# Allegro board pcb_final.brd
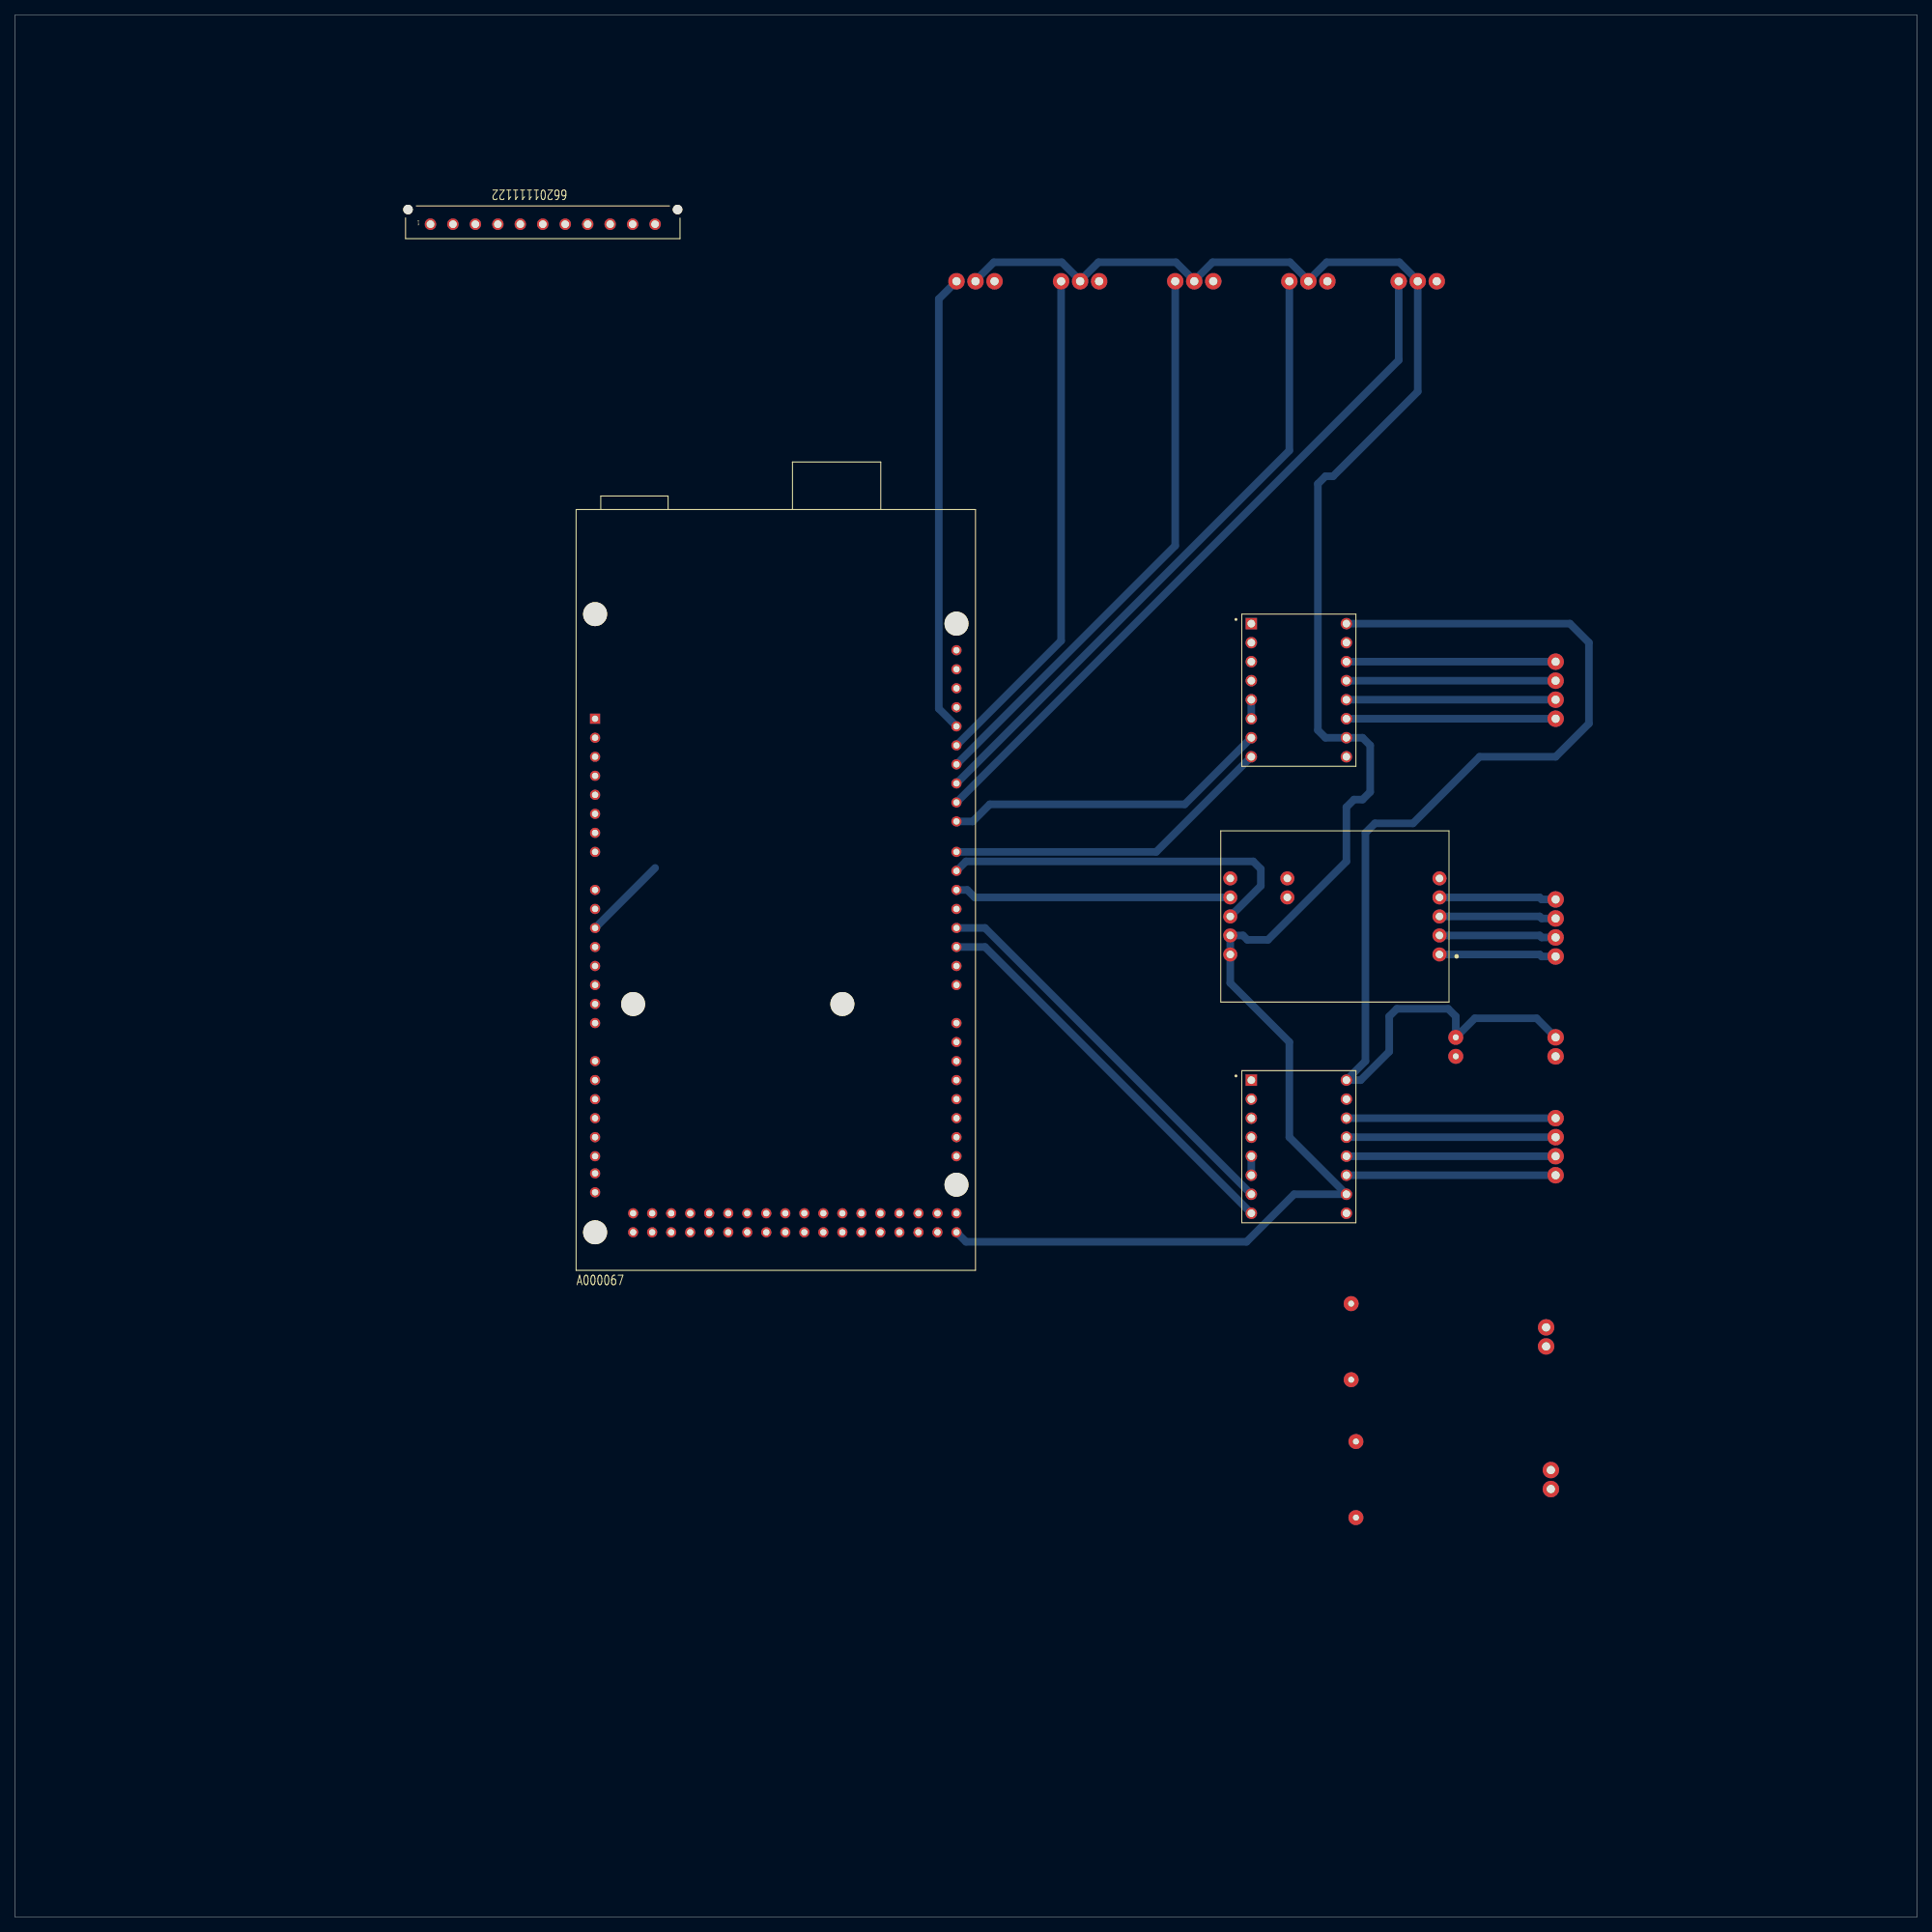
[diagram p0: board, top side]
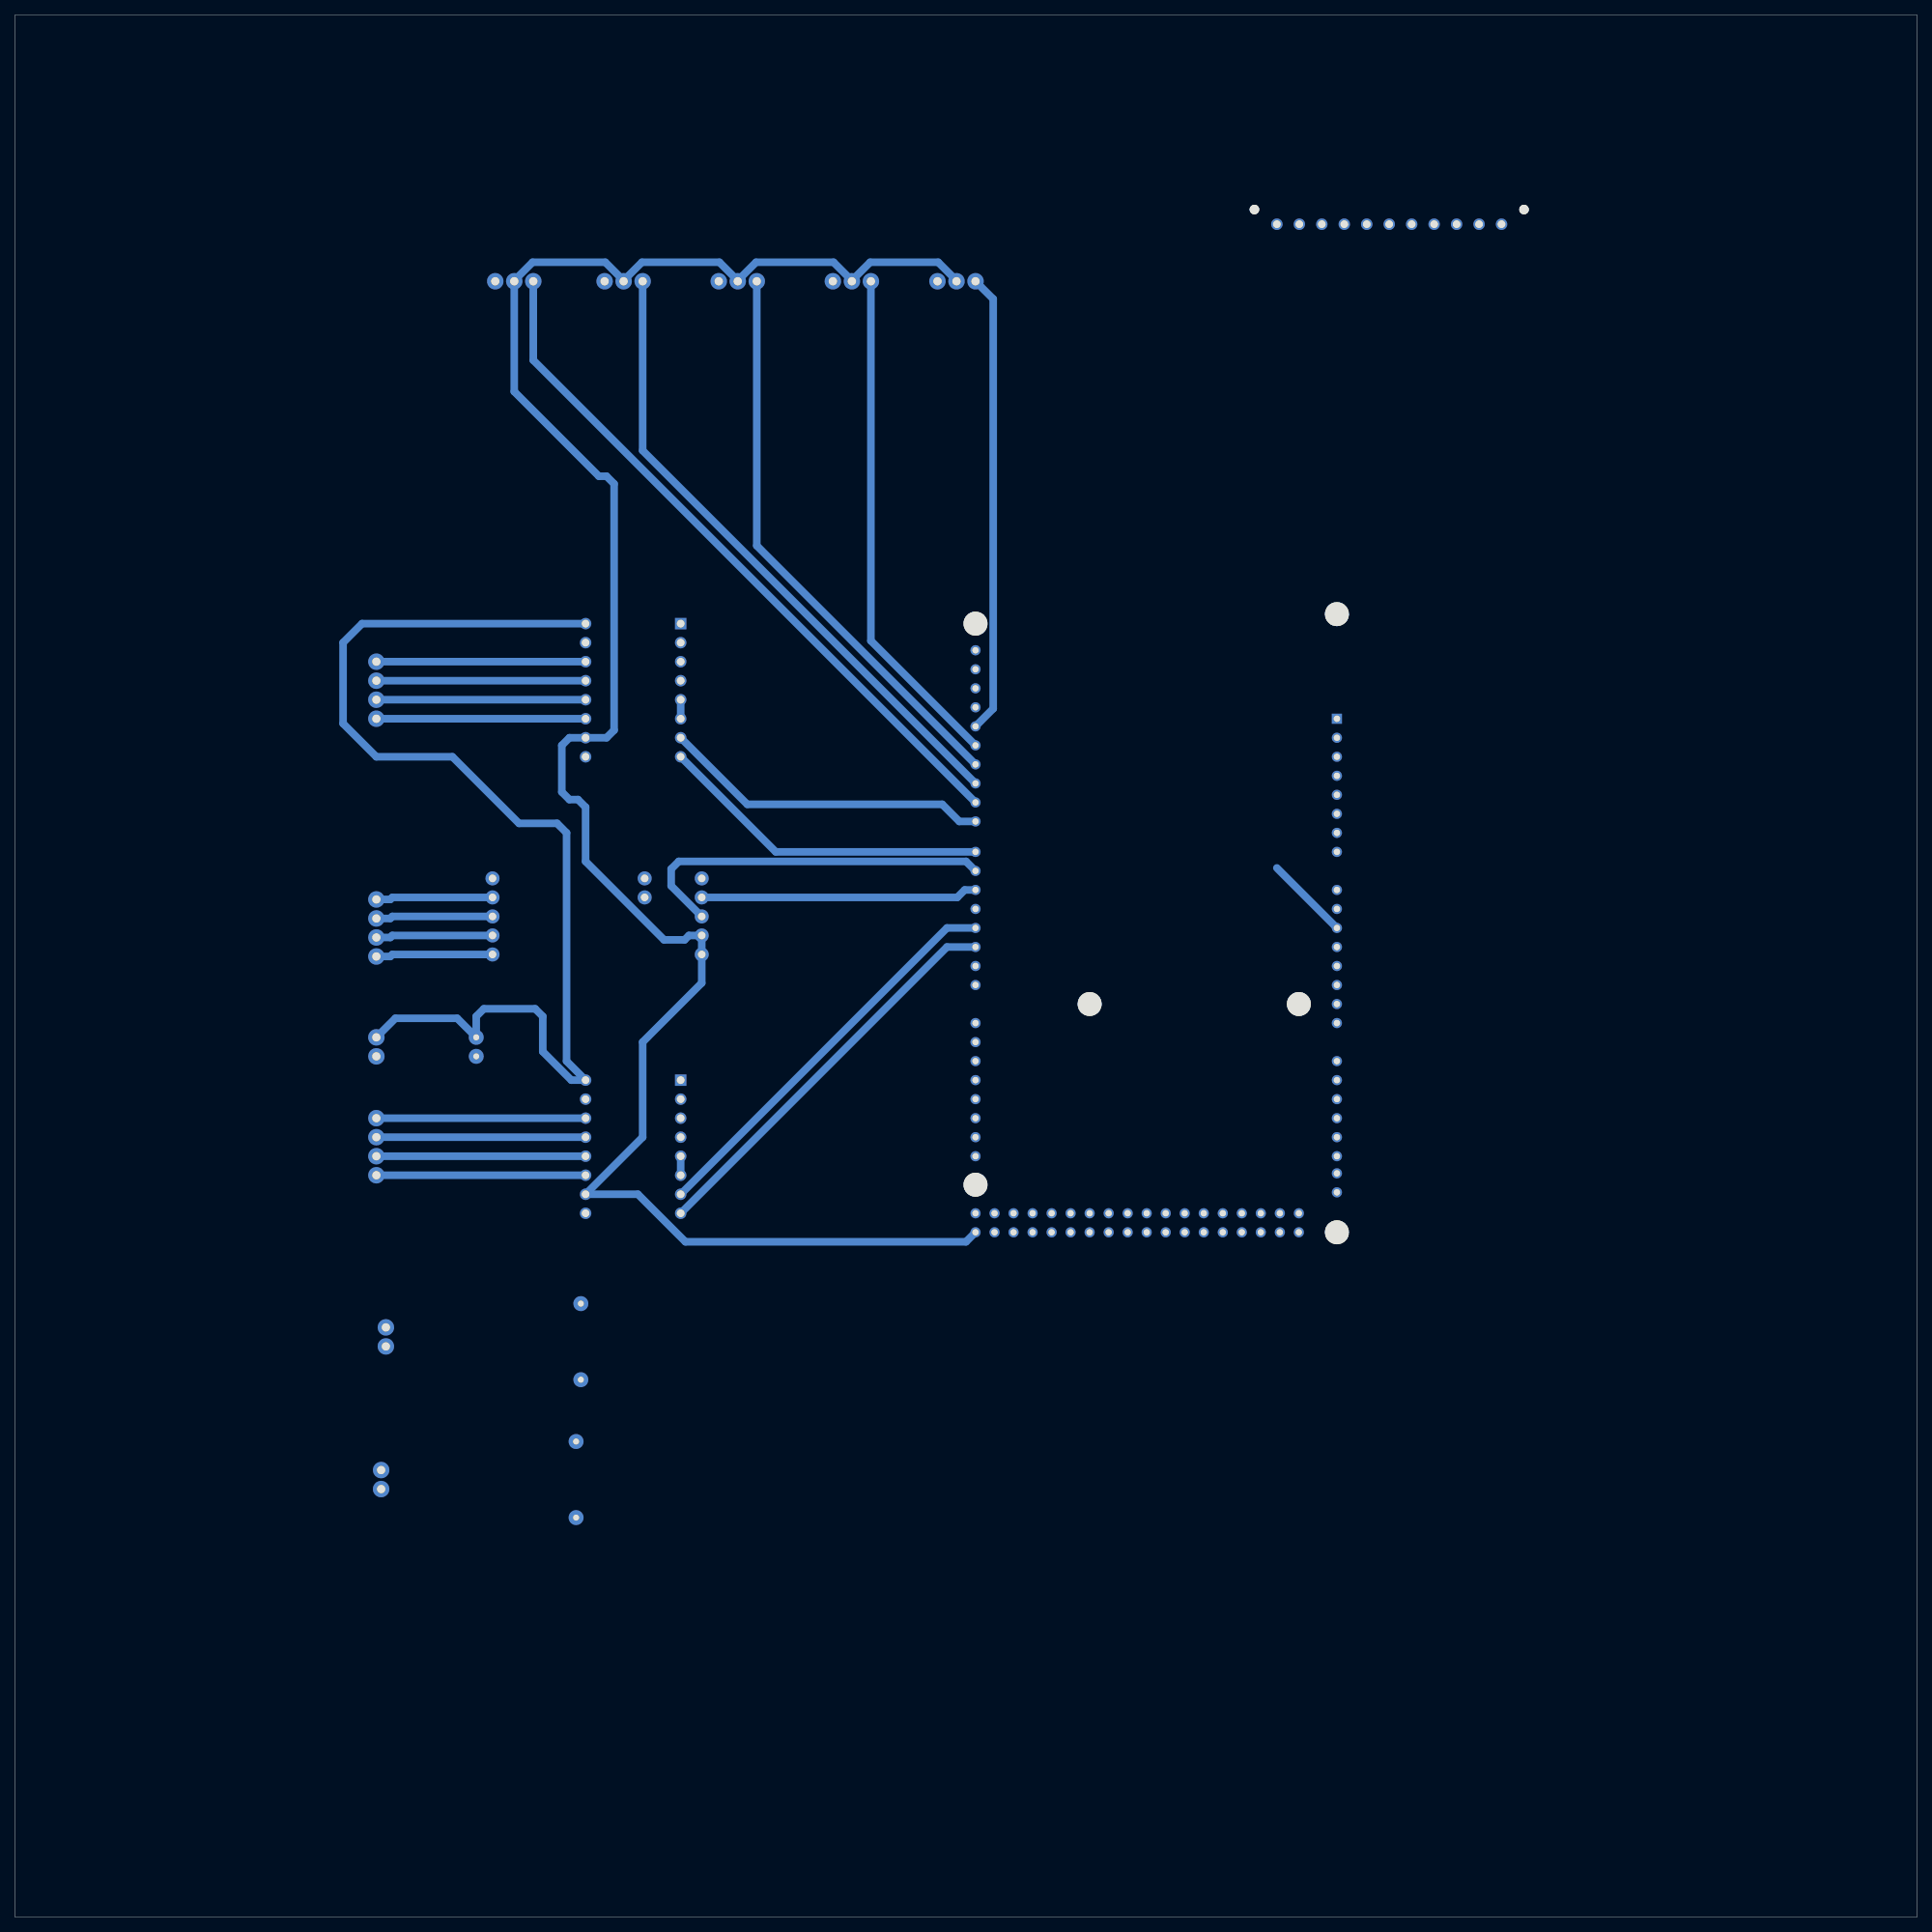
[diagram p1: board, bottom side, seen from below]

Outline 254 x 254 mm; copper layers: TOP, BOTTOM. Coordinates in mm from the lower left corner of the outline.
Outline path: 0,254 254,254 254,0 0,0 0,254

## Design rules (mm)
constraint set DEFAULT: min track width 1.016

## Placement (name value [footprint] x y rotation side)
ARDUINO_MEGA2560  A000067  [ARDUINO_A000067]  101.6 137.16 0 top
BALANCE  HEADER 4  [CON_04]  205.74 135.89 270 top
BOUTON_BLEU  HEADER 2  [CON_02]  205.1 59.69 270 top
BOUTON_ROUGE  HEADER 2  [CON_02]  204.47 78.74 270 top
C1  100u  [CAP_03]  192.41 114.94 90 top
DRIVER_BALANCE  SEN-13879  [SPARKFUN_SEN-13879]  175.26 134.62 180 top
DRIVER_MOTEUR1  A4988_STEPPER_MOTOR_DRIVER_CARRIER  [MODULE_A4988_STEPPER_MOTOR_]  171.45 163.83 0 top
DRIVER_MOTEUR2  A4988_STEPPER_MOTOR_DRIVER_CARRIER  [MODULE_A4988_STEPPER_MOTOR_]  171.45 102.87 0 top
ECRAN  1-11  [66201111122]  70.48 226.06 180 top
MOTEUR_PAP1  HEADER 4  [CON_04]  205.74 160.02 90 top
MOTEUR_PAP2  HEADER 4  [CON_04]  205.74 99.06 90 top
R1  10k  [RES_01]  178.44 71.75 90 top
R2  10k  [RES_01]  179.07 63.5 270 top
SERVO1  HEADER 3  [CON_03]  184.78 218.44 0 top
SERVO2  HEADER 3  [CON_03]  170.18 218.44 0 top
SERVO3  HEADER 3  [CON_03]  154.94 218.44 0 top
SERVO4  HEADER 3  [CON_03]  139.7 218.44 0 top
SERVO5  HEADER 3  [CON_03]  125.73 218.44 0 top
V_MOTEUR  HEADER 2  [CON_02]  205.74 117.47 270 top

## Library data of the parts
ARDUINO_MEGA2560 = A000067
BALANCE MOTEUR_PAP1 MOTEUR_PAP2 = HEADER 4
BOUTON_BLEU BOUTON_ROUGE V_MOTEUR = HEADER 2
C1 = C
DRIVER_BALANCE = SEN-13879
DRIVER_MOTEUR1 DRIVER_MOTEUR2 = A4988_STEPPER_MOTOR_DRIVER_CA
ECRAN = 1-11
R1 R2 = R
SERVO1-SERVO5 = HEADER 3

## Footprints (pads in the part's own frame, mm; a bottom-side part is the same pattern mirrored in y, then rotated)
66201111122
  round 1.27 hole 1.27 unplated: (-18,-1.96) (18,-1.96)
  round 1.53 hole 1.02: 1(15,0) 2(12,0) 3(9,0) 4(6,0) 5(3,0) 6(0,0) 7(-3,0) 8(-6,0) 9(-9,0) 10(-12,0) 11(-15,0)
ARDUINO_A000067
  round 3.2 hole 3.2 unplated: (-24.13,36.83) (-24.13,-45.72) (-19.05,-15.24) (8.89,-15.24) (24.13,35.56) (24.13,-39.37)
  round 1.358 hole 0.85: 1(24.13,-10.16) 2(24.13,-7.62) 3(24.13,-5.08) 3V3(-24.13,15.24) 4(24.13,-2.54) 5(24.13,0) 5V_1(-24.13,12.7) 5V_2(24.13,-43.18) 5V_3(24.13,-45.72) 6(24.13,2.54) 7(24.13,5.08) 8(24.13,9.144) 9(24.13,11.684) 10(24.13,14.224) 11(24.13,16.764) 12(24.13,19.304) 13(24.13,21.844) 14(24.13,-17.78) 15(24.13,-20.32) 16(24.13,-22.86) 17(24.13,-25.4) 18(24.13,-27.94) 19(24.13,-30.48) 20(24.13,-33.02) 21(24.13,-35.56) 22(21.59,-43.18) 23(21.59,-45.72) 24(19.05,-43.18) 25(19.05,-45.72) 26(16.51,-43.18) 27(16.51,-45.72) 28(13.97,-43.18) 29(13.97,-45.72) 30(11.43,-43.18) 31(11.43,-45.72) 32(8.89,-43.18) 33(8.89,-45.72) 34(6.35,-43.18) 35(6.35,-45.72) 36(3.81,-43.18) 37(3.81,-45.72) 38(1.27,-43.18) 39(1.27,-45.72) 40(-1.27,-43.18) 41(-1.27,-45.72) 42(-3.81,-43.18) 43(-3.81,-45.72) 44(-6.35,-43.18) 45(-6.35,-45.72) 46(-8.89,-43.18) 47(-8.89,-45.72) 48(-11.43,-43.18) 49(-11.43,-45.72) 50(-13.97,-43.18) 51(-13.97,-45.72) 52(-16.51,-43.18) 53(-16.51,-45.72) AD0(-24.13,0) AD1(-24.13,-2.54) AD2(-24.13,-5.08) AD3(-24.13,-7.62) AD4(-24.13,-10.16) AD5(-24.13,-12.7) AD6(-24.13,-15.24) AD7(-24.13,-17.78) AD8(-24.13,-22.86) AD9(-24.13,-25.4) AD10(-24.13,-27.94) AD11(-24.13,-30.48) AD12(-24.13,-33.02) AD13(-24.13,-35.56) AD14(-24.13,-37.846) AD15(-24.13,-40.386) AREF(24.13,26.924) GND1(-24.13,10.16) GND2(-24.13,7.62) GND3(24.13,24.384) GND4(-19.05,-43.18) GND5(-19.05,-45.72) IOREF(-24.13,20.32) RESET(-24.13,17.78) RX0(24.13,-12.7) SCL(24.13,32.004) SDA(24.13,29.464) VIN(-24.13,5.08)
  rect 1.358x1.358 hole 0.85: NC(-24.13,22.86)
CAP_03
  round 2 hole 0.8: 1(0,0) 2(2.54,0)
CON_02
  round 2.2 hole 1.1: 1(0,0) 2(2.54,0)
CON_03
  round 2.2 hole 1.1: 1(0,0) 2(2.54,0) 3(5.08,0)
CON_04
  round 2.2 hole 1.1: 1(0,0) 2(2.54,0) 3(5.08,0) 4(7.62,0)
MODULE_A4988_STEPPER_MOTOR_
  rect 1.53x1.53 hole 1.02: 1(-6.35,8.89)
  round 1.53 hole 1.02: 2(-6.35,6.35) 3(-6.35,3.81) 4(-6.35,1.27) 5(-6.35,-1.27) 6(-6.35,-3.81) 7(-6.35,-6.35) 8(-6.35,-8.89) 9(6.35,-8.89) 10(6.35,-6.35) 11(6.35,-3.81) 12(6.35,-1.27) 13(6.35,1.27) 14(6.35,3.81) 15(6.35,6.35) 16(6.35,8.89)
RES_01
  round 2 hole 0.8: 1(0,0) 2(10.16,0)
SPARKFUN_SEN-13879
  round 1.88 hole 1.016: 1(-14.97,6.08) 2(-14.97,3.54) 3(-14.97,1) 4(-14.97,-1.54) 5(-14.97,-4.08) 6(12.97,-4.08) 7(12.97,-1.54) 8(12.97,1) 9(12.97,3.54) 10(12.97,6.08) 11(5.35,-1.54) 12(5.35,-4.08)

## Nets
VDD: ARDUINO_MEGA2560.5V_3 BOUTON_BLEU.1 BOUTON_ROUGE.1 DRIVER_BALANCE.9 DRIVER_BALANCE.10 DRIVER_MOTEUR1.10 DRIVER_MOTEUR2.10 SERVO1.2 SERVO2.2 SERVO3.2 SERVO4.2 SERVO5.2
0: ARDUINO_MEGA2560.GND5 C1.1 DRIVER_BALANCE.6 DRIVER_MOTEUR1.9 DRIVER_MOTEUR1.15 DRIVER_MOTEUR2.9 DRIVER_MOTEUR2.15 ECRAN.1 R1.2 R2.2 SERVO1.3 SERVO2.3 SERVO3.3 SERVO4.3 SERVO5.3 V_MOTEUR.2
1_1A: DRIVER_MOTEUR1.12 MOTEUR_PAP1.2
1_1B: DRIVER_MOTEUR1.11 MOTEUR_PAP1.1
1_2A: DRIVER_MOTEUR1.13 MOTEUR_PAP1.3
1_2B: DRIVER_MOTEUR1.14 MOTEUR_PAP1.4
2: ARDUINO_MEGA2560.2 DRIVER_MOTEUR2.8
2_1A: DRIVER_MOTEUR2.12 MOTEUR_PAP2.2
2_1B: DRIVER_MOTEUR2.11 MOTEUR_PAP2.1
2_2A: DRIVER_MOTEUR2.13 MOTEUR_PAP2.3
2_2B: DRIVER_MOTEUR2.14 MOTEUR_PAP2.4
3: ARDUINO_MEGA2560.3 DRIVER_MOTEUR2.7
3.3: ARDUINO_MEGA2560.3V3 ECRAN.2
5: ARDUINO_MEGA2560.5 DRIVER_BALANCE.7
6: ARDUINO_MEGA2560.6 DRIVER_BALANCE.8
7: ARDUINO_MEGA2560.7 DRIVER_MOTEUR1.8
8: ARDUINO_MEGA2560.8 DRIVER_MOTEUR1.7
9: ARDUINO_MEGA2560.9 SERVO1.1
10: ARDUINO_MEGA2560.10 SERVO2.1
11: ARDUINO_MEGA2560.11 SERVO3.1
12: ARDUINO_MEGA2560.12 SERVO4.1
13: ARDUINO_MEGA2560.13 SERVO5.1
22: ARDUINO_MEGA2560.22 ECRAN.10
24: ARDUINO_MEGA2560.24 ECRAN.9
26: ARDUINO_MEGA2560.26 ECRAN.7
28: ARDUINO_MEGA2560.28 ECRAN.6
40: ARDUINO_MEGA2560.40 BOUTON_ROUGE.2 R1.1
41: ARDUINO_MEGA2560.41 BOUTON_BLEU.2 R2.1
50: ARDUINO_MEGA2560.50 ECRAN.4
51: ARDUINO_MEGA2560.51 ECRAN.5
52: ARDUINO_MEGA2560.52 ECRAN.3(9)
A2: ARDUINO_MEGA2560.AD2 ECRAN.11
A3: ARDUINO_MEGA2560.AD3 ECRAN.8
BLACK: BALANCE.3 DRIVER_BALANCE.2
GREEN: BALANCE.1 DRIVER_BALANCE.4
RED: BALANCE.4 DRIVER_BALANCE.1
VALIM: C1.2 DRIVER_MOTEUR1.16(VMOT) DRIVER_MOTEUR2.16(VMOT) V_MOTEUR.1
WHITE: BALANCE.2 DRIVER_BALANCE.3
N29102: DRIVER_MOTEUR1.5 DRIVER_MOTEUR1.6
N29116: DRIVER_MOTEUR2.5 DRIVER_MOTEUR2.6

Pads without a net: ARDUINO_MEGA2560 1 4 5V_1 5V_2 14 15 16 17 18 19 20 21 23 25 27 29 30 31 32 33 34 35 36 37 38 39 42 43 44 45 46 47 48 49 53 AD0 AD1 AD4 AD5 AD6 AD7 AD8 AD9 AD10 AD11 AD12 AD13 AD14 AD15 AREF GND1 GND2 GND3 GND4 IOREF NC RESET RX0 SCL SDA VIN; DRIVER_BALANCE 5 11 12; DRIVER_MOTEUR1 1 2 3 4; DRIVER_MOTEUR2 1 2 3 4

## Routing (per net, layer and track width the routed paths; a pad name or vN(x,y) marks a point on that pad's centre or on a via; arc(x,y) is an arc through that point)
VDD: length 275.3
  BOTTOM w1.016: 172.72,218.53 175.17,220.98 184.88,220.98 187.32,218.53 SERVO1.2 187.32,203.71 176.02,192.41 175.01,192.41 173.99,191.39 173.99,158.5 175.01,157.48 DRIVER_MOTEUR1.10 179.96,157.48 180.97,156.46 180.97,150.24 179.96,149.22 178.82,149.22 177.8,148.21 177.8,140.97 167.32,130.49 164.58,130.49 163.99,131.08 DRIVER_BALANCE.9 DRIVER_BALANCE.10 162.29,124.73 170.18,116.84 170.18,104.14 DRIVER_MOTEUR2.10 170.81,96.52 164.47,90.17 127,90.17 ARDUINO_MEGA2560.5V_3 ; 172.72,218.53 170.27,220.98 159.93,220.98 157.48,218.53 ; 172.72,218.53 SERVO2.2 ; 142.24,218.53 144.69,220.98 155.03,220.98 157.48,218.53 ; 142.24,218.53 SERVO4.2 ; 142.24,218.53 139.79,220.98 130.72,220.98 128.27,218.53 SERVO5.2 ; SERVO3.2 157.48,218.53
1_1A: length 27.9
  BOTTOM w1.016: MOTEUR_PAP1.2 DRIVER_MOTEUR1.12
1_1B: length 27.9
  BOTTOM w1.016: MOTEUR_PAP1.1 DRIVER_MOTEUR1.11
1_2A: length 27.9
  BOTTOM w1.016: MOTEUR_PAP1.3 DRIVER_MOTEUR1.13
1_2B: length 27.9
  BOTTOM w1.016: MOTEUR_PAP1.4 DRIVER_MOTEUR1.14
2: length 54.1
  BOTTOM w1.016: DRIVER_MOTEUR2.8 129.54,129.54 ARDUINO_MEGA2560.2
2_1A: length 27.9
  BOTTOM w1.016: MOTEUR_PAP2.2 DRIVER_MOTEUR2.12
2_1B: length 27.9
  BOTTOM w1.016: MOTEUR_PAP2.1 DRIVER_MOTEUR2.11
2_2A: length 27.9
  BOTTOM w1.016: MOTEUR_PAP2.3 DRIVER_MOTEUR2.13
2_2B: length 27.9
  BOTTOM w1.016: MOTEUR_PAP2.4 DRIVER_MOTEUR2.14
3: length 54.1
  BOTTOM w1.016: DRIVER_MOTEUR2.7 129.54,132.08 ARDUINO_MEGA2560.3
5: length 37
  BOTTOM w1.016: DRIVER_BALANCE.7 128.17,136.16 127.17,137.16 ARDUINO_MEGA2560.5
6: length 49.6
  BOTTOM w1.016: ARDUINO_MEGA2560.6 127,140.97 165.35,140.97 166.37,139.95 166.37,137.7 DRIVER_BALANCE.8
7: length 44.6
  BOTTOM w1.016: ARDUINO_MEGA2560.7 152.4,142.24 DRIVER_MOTEUR1.8
8: length 44
  BOTTOM w1.016: DRIVER_MOTEUR1.7 156.21,148.59 130.18,148.59 127.89,146.3 ARDUINO_MEGA2560.8
9: length 94.1
  BOTTOM w1.016: ARDUINO_MEGA2560.9 184.78,207.9 SERVO1.1
10: length 85.5
  BOTTOM w1.016: ARDUINO_MEGA2560.10 170.18,195.83 SERVO2.1
11: length 76.6
  BOTTOM w1.016: ARDUINO_MEGA2560.11 154.94,183.13 SERVO3.1
12: length 67.8
  BOTTOM w1.016: ARDUINO_MEGA2560.12 139.7,170.43 SERVO4.1
13: length 61.4
  BOTTOM w1.016: SERVO5.1 123.37,216.08 123.37,161.37 ARDUINO_MEGA2560.13
A2: length 11.3
  BOTTOM w1.016: 85.48,140.09 ARDUINO_MEGA2560.AD2
BLACK: length 15.6
  BOTTOM w1.016: BALANCE.3 203.88,130.81 203.61,131.08 DRIVER_BALANCE.2
GREEN: length 15.6
  BOTTOM w1.016: BALANCE.1 203.88,135.89 203.61,136.16 DRIVER_BALANCE.4
RED: length 15.6
  BOTTOM w1.016: DRIVER_BALANCE.1 203.61,128.54 203.88,128.27 BALANCE.4
VALIM: length 154.2
  BOTTOM w1.016: DRIVER_MOTEUR1.16 207.65,172.72 210.19,170.18 210.19,159.38 205.74,154.94 195.58,154.94 186.69,146.05 181.61,146.05 180.34,144.78 180.34,114.3 DRIVER_MOTEUR2.16 179.71,111.76 183.51,115.57 183.51,120.27 184.53,121.28 191.39,121.28 192.41,120.27 C1.2 194.94,120.02 203.2,120.02 V_MOTEUR.1
WHITE: length 15.6
  BOTTOM w1.016: BALANCE.2 203.88,133.35 203.61,133.62 DRIVER_BALANCE.3
N29102: length 2.5
  BOTTOM w1.016: DRIVER_MOTEUR1.6 DRIVER_MOTEUR1.5
N29116: length 2.5
  BOTTOM w1.016: DRIVER_MOTEUR2.5 DRIVER_MOTEUR2.6
